# Altium PCB Obscurum-MB_1b.PcbDoc
Units mm, origin at the board's own origin, x right, y up, seen from the top; angles counter-clockwise.
Board outline 100 x 100 mm, 2 copper layers (Top Layer, Bottom Layer), stack 1.535 mm thick; 135 components, 76 nets, 310 pads, 0 vias.
Unrouted connection lines stored in the file: 220.
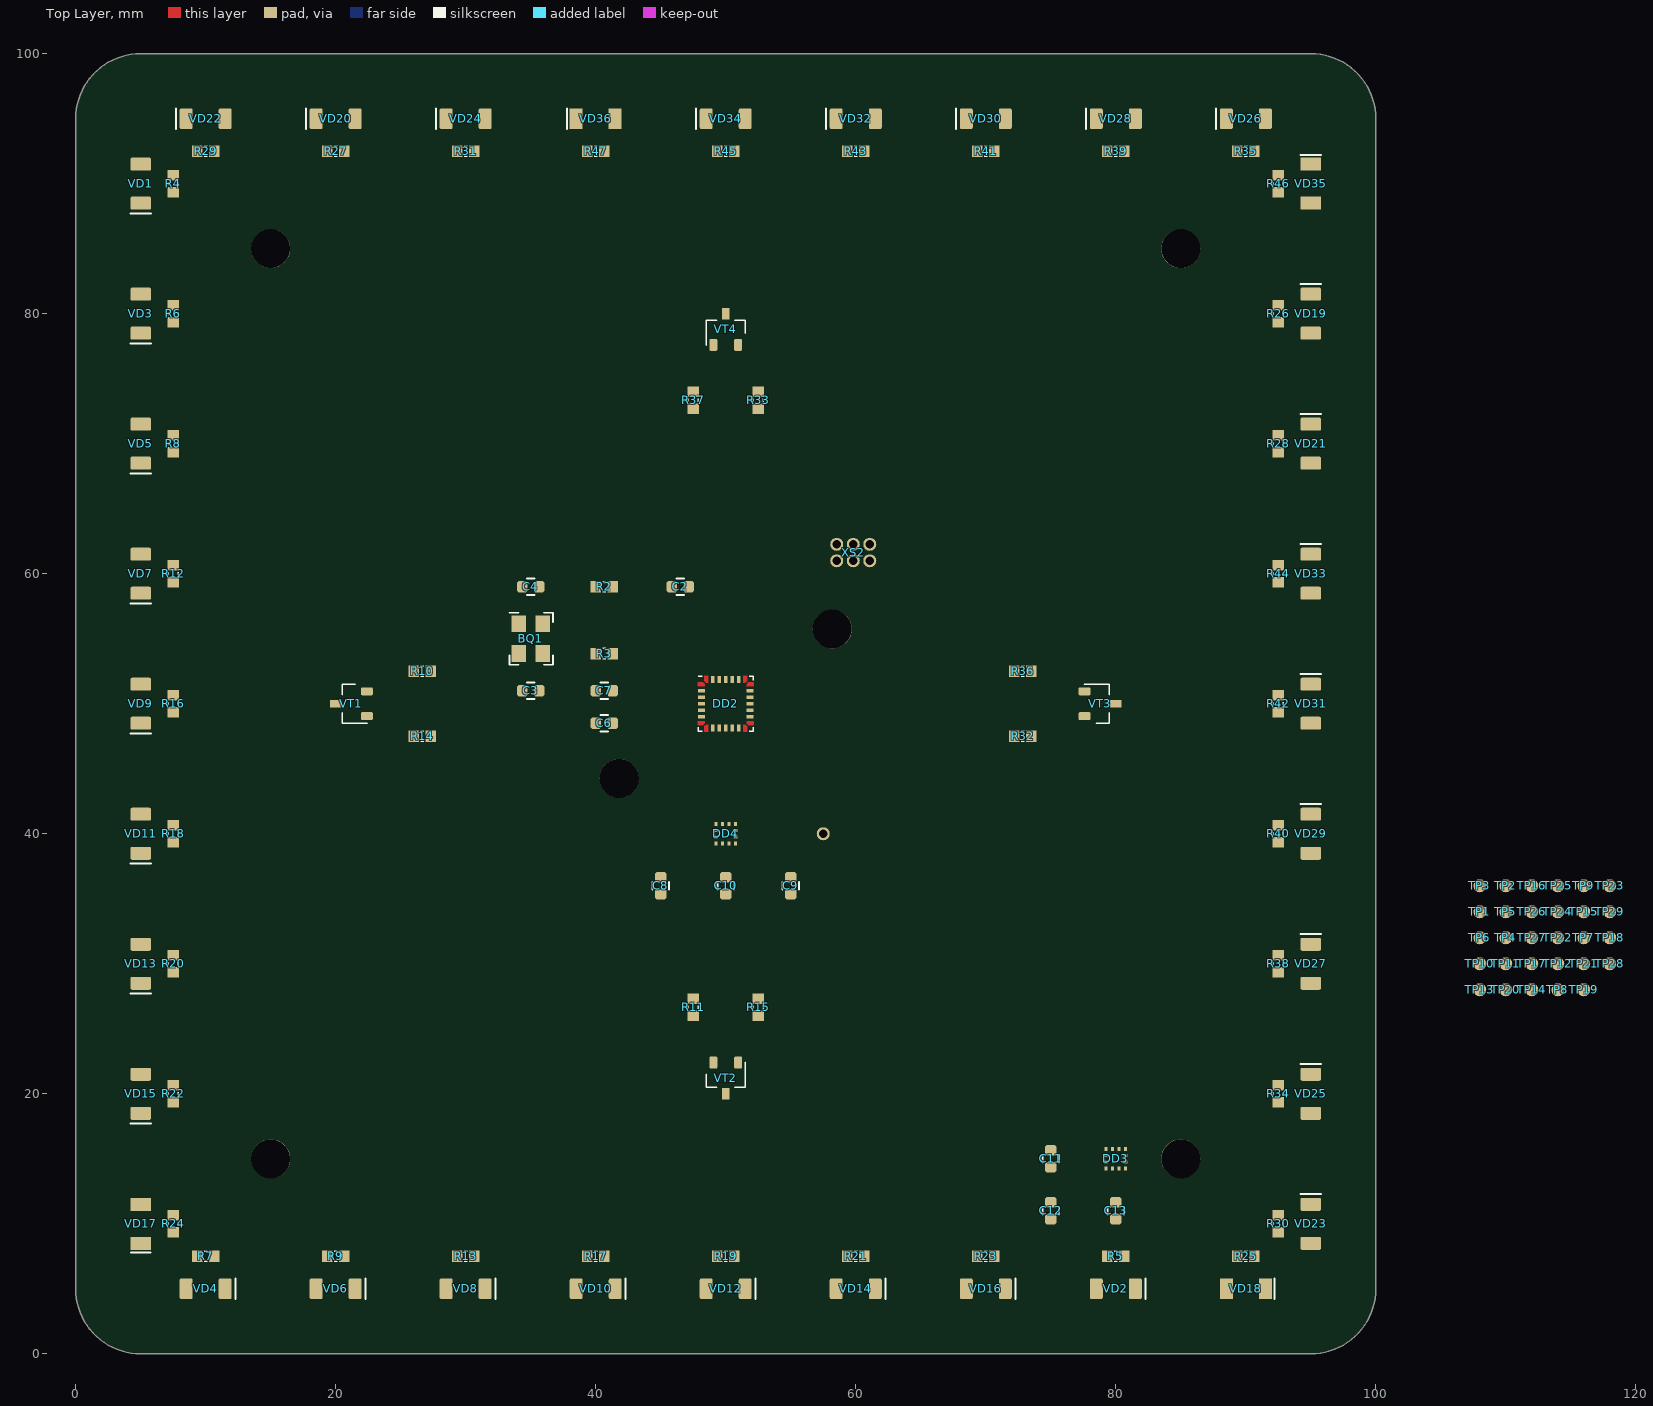
[diagram p0: Top Layer view]
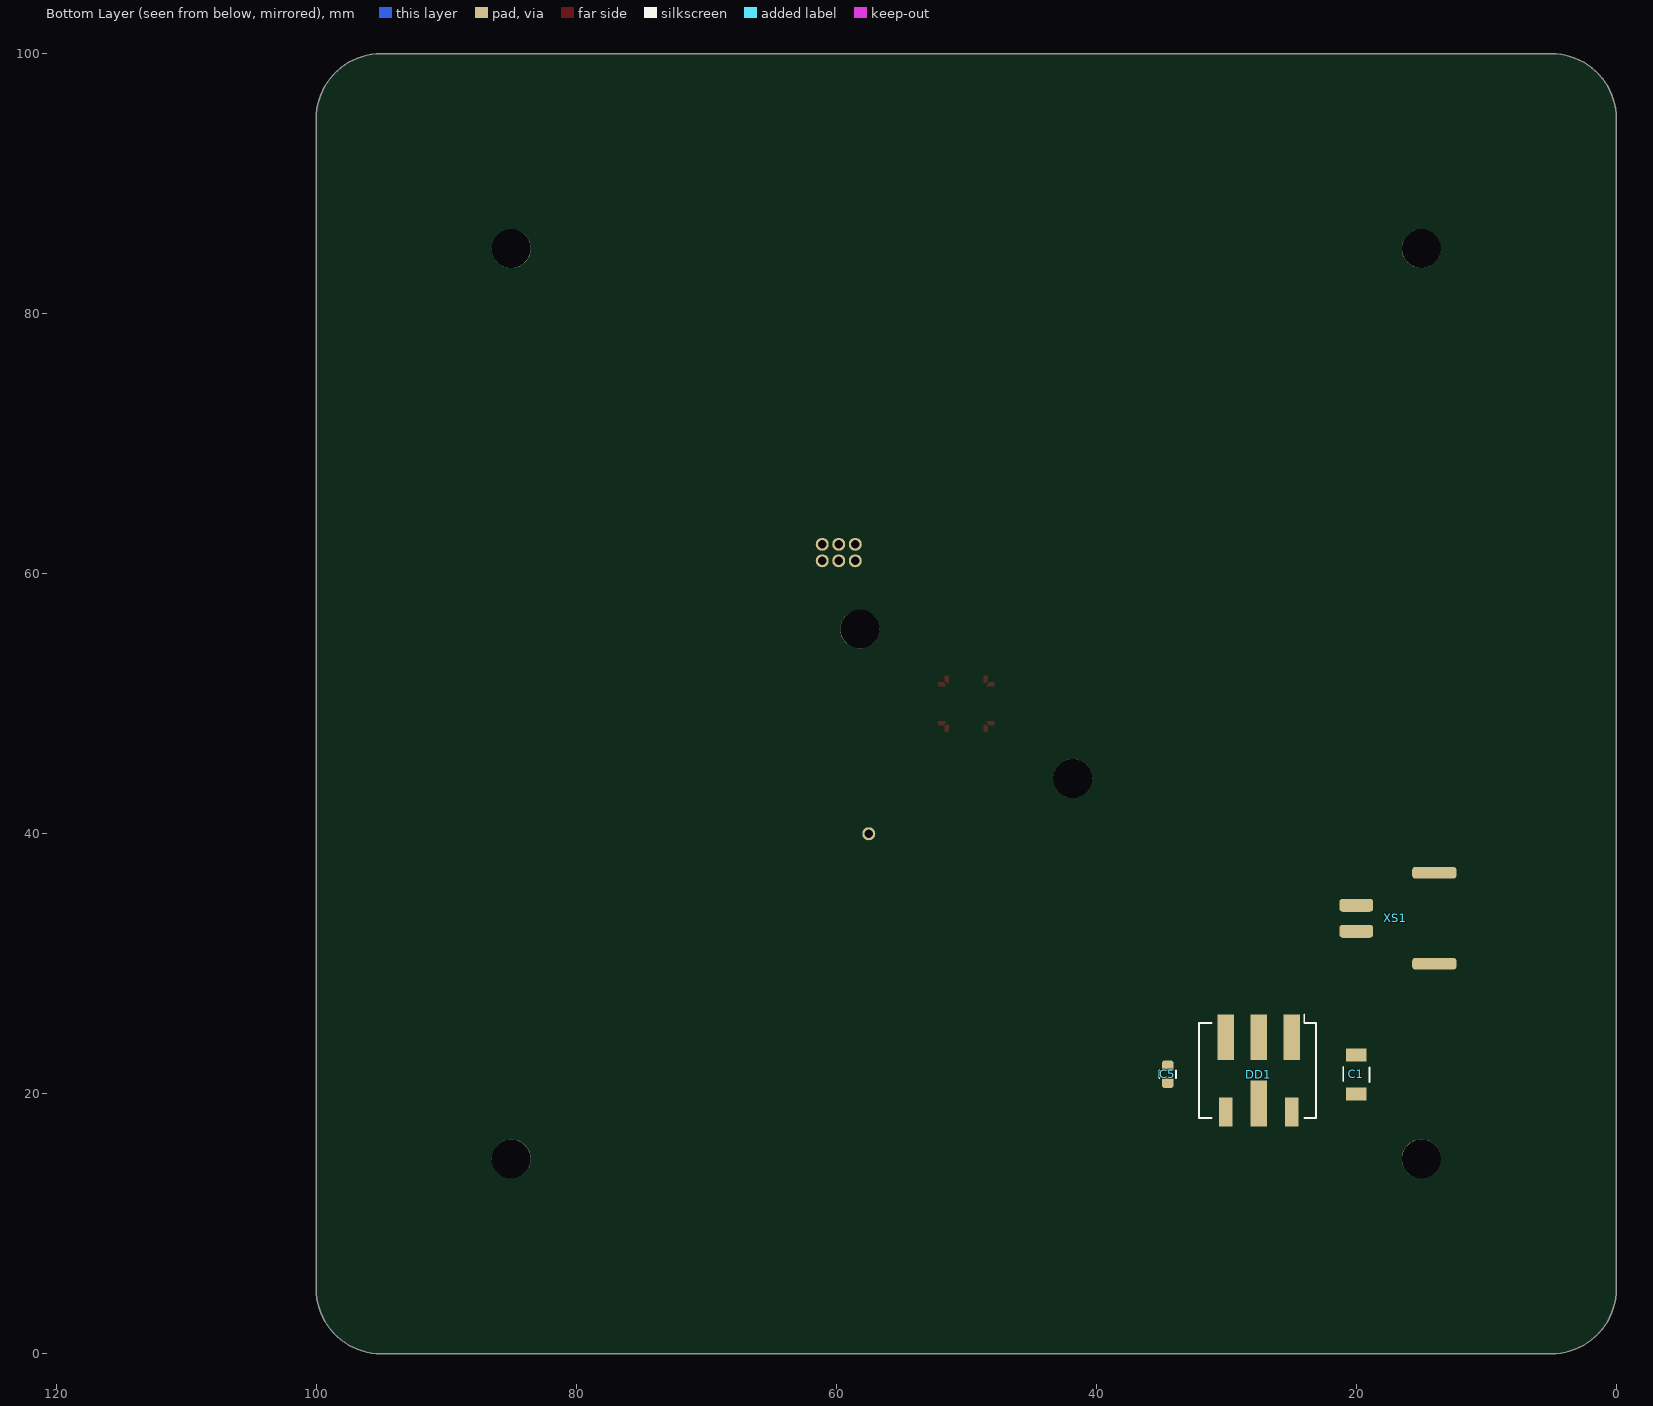
[diagram p1: Bottom Layer view, seen from below]

## Layer stack, top to bottom
Top Solder: solder mask 0.0254, SM-001, Dk 4
Top Layer: signal copper 0.018
Dielectric 1: core 1.4986, Core-043, Dk 4.3
Bottom Layer: signal copper 0.018
Bottom Solder: solder mask 0.0254, SM-001, Dk 4

## Board outline
0,5 ccw(c5,5) 5,0 95,0 ccw(c95,5) 100,5 100,95 ccw(c95,95) 95,100 5,100 ccw(c5,95) 0,95

## Design rules (kind name [scope] priority, off if disabled: settings)
AcuteAngle [All] p1: minimum=3.50000000000000E+0001 checktracksonly=FALSE
BoardOutlineClearance "BoardOutlineClearance 1" [All] p1: gap=0.25 ignorepadtopadclearanceinfootprint=FALSE except(0: Arc-SplitContinuation Track-SplitContinuation SMDPad-SplitContinuation THPad-SplitContinuation Via-SplitContinuation Fill-SplitContinuation Poly-SplitContinuation Region-SplitContinuation Text-SplitContinuation) // Milling
BoardOutlineClearance "BoardOutlineClearance 2" [All] p2: gap=0.4 ignorepadtopadclearanceinfootprint=FALSE except(0: Arc-SplitContinuation Track-SplitContinuation SMDPad-SplitContinuation THPad-SplitContinuation Via-SplitContinuation Fill-SplitContinuation Poly-SplitContinuation Region-SplitContinuation Text-SplitContinuation) // V-Cut
Clearance [(ObjectKind = 'Pad') And (AsMM(HoleDiameter) = 3)] p1: gap=0.7 ignorepadtopadclearanceinfootprint=FALSE
Clearance "Clearance-1 1 Oz" [All] p2: gap=0.2 ignorepadtopadclearanceinfootprint=TRUE except(0.25: Arc-Hole Track-Hole SMDPad-Hole THPad-Hole Via-Hole Fill-Hole Poly-Hole Region-Hole Text-Hole) // Standart
Clearance "Clearance-1 1/2 Oz" [All] p3: gap=0.125 ignorepadtopadclearanceinfootprint=FALSE except(0.2: Arc-Fill Arc-Poly Track-Fill Track-Poly SMDPad-SMDPad SMDPad-Fill SMDPad-Poly THPad-Fill THPad-Poly Via-Fill Via-Poly Fill-Fill Fill-Poly Poly-Poly Poly-Region Poly-Text; 0.25: Arc-Hole Track-Hole SMDPad-Hole THPad-Hole Via-Hole Fill-Hole Poly-Hole Region-Hole Text-Hole) // Standart
ComponentClearance [All] p1: gap=0.254 collisioncheckmode=3 verticalgap=0.254 showdistances=FALSE donotcheckwithout3dbody=TRUE
DiffPairsRouting "DiffPairsRouting 1 Oz" [All] p1: maxlimit=0.254 minlimit=0.2 mostfreqgap=0.254 toplayer_minwidth=0.2 toplayer_maxwidth=0.381 toplayer_prefwidth=0.381 bottomlayer_minwidth=0.2 bottomlayer_maxwidth=0.381 bottomlayer_prefwidth=0.381 maxuncoupledlength=12.7
DiffPairsRouting "DiffPairsRouting 1/2 Oz" [All] p2: maxlimit=0.254 minlimit=0.1 mostfreqgap=0.254 toplayer_minwidth=0.1 toplayer_maxwidth=0.381 toplayer_prefwidth=0.381 bottomlayer_minwidth=0.1 bottomlayer_maxwidth=0.381 bottomlayer_prefwidth=0.381 maxuncoupledlength=12.7
HoleSize "Minimum HoleSize" [IsPad] p1: absolutevalues=TRUE maxlimit=5.9 minlimit=0.6 maxpercent=80.000 minpercent=20.000
HoleSize "Minimum HoleSize VIA 1" [IsVia] p2: absolutevalues=TRUE maxlimit=5.9 minlimit=0.3 maxpercent=80.000 minpercent=20.000 // Standart
HoleToHoleClearance Hole2HoleClearance [All] p1: gap=0.25 allowstackedmicrovias=FALSE
MinimumAnnularRing "Minimum AR VIA Standart" [IsVia] p1: minimumring=0.15
MinimumAnnularRing "Minimum AR PAD Standart" [IsPAD] p2: minimumring=0.2
MinimumAnnularRing "Minimum AR VIA Advance" [IsVia] p3: minimumring=0.1
MinimumAnnularRing "Minimum AR PAD Advance" [IsPAD] p4: minimumring=0.15
MinimumSolderMaskSliver "SolderMask Bridge Standart" [All] p1: minsoldermaskwidth=0.15 // All Masks
MinimumSolderMaskSliver "SolderMask Bridge Advance" [All] p2: minsoldermaskwidth=0.1 // Mask LDI
PlaneClearance [(ObjectKind = 'Pad') And (AsMM(HoleDiameter) = 3)] p1: clearance=1
PlaneClearance "PlaneClearance 1 Oz" [All] p2: clearance=0.2
PlaneClearance "PlaneClearance-1 1/2 Oz" [All] p3: clearance=0.2 // Standart
PlaneConnect "TermalConnect-1 1 Oz" [All] p1: planeconnectstyle=Relief reliefexpansion=0.2 reliefentries=4 reliefconductorwidth=0.2 reliefairgap=0.2 // Standart
PolygonConnect "PolygonConnect-1 1 Oz" [All] p1: thpad.connectstyle=Relief thpad.reliefconductorwidth=0.2 thpad.reliefentries=4 thpad.polygonreliefangle="90 Angle" thpad.airgapwidth=0.2 smdpad.connectstyle=Relief smdpad.reliefconductorwidth=0.2 smdpad.reliefentries=4 smdpad.polygonreliefangle="90 Angle" smdpad.airgapwidth=0.2 via.connectstyle=Direct via.reliefconductorwidth=0.254 via.reliefentries=4 via.polygonreliefangle="90 Angle" via.airgapwidth=0.254 // Standart
PolygonConnect "PolygonConnect-1 1/2 Oz" [All] p2: thpad.connectstyle=Relief thpad.reliefconductorwidth=0.15 thpad.reliefentries=4 thpad.polygonreliefangle="90 Angle" thpad.airgapwidth=0.2 smdpad.connectstyle=Relief smdpad.reliefconductorwidth=0.2 smdpad.reliefentries=4 smdpad.polygonreliefangle="90 Angle" smdpad.airgapwidth=0.2 via.connectstyle=Direct via.reliefconductorwidth=0.254 via.reliefentries=4 via.polygonreliefangle="90 Angle" via.airgapwidth=0.254 // Standart
RoutingCorners [All] p1 off: cornerstyle=45-Degree minsetback=2.54 maxsetback=2.54
RoutingVias [All] p1: holewidth=0.3 width=0.6 viastyle="Through Hole" minholewidth=0.2 minwidth=0.4 maxholewidth=5.9 maxwidth=6.4
SilkToSilkClearance Silk2SilkClearance [All] p1 off: silktosilkclearance=0.15
SilkToSolderMaskClearance Silk2SolderMaskClearance [IsPad] p1 off: minsilkscreentomaskgap=0.15 clearancetoexposedcopper=TRUE
SolderMaskExpansion SolderMaskExpansion-1 [All] p1: expansion=0.05 istentingtop=FALSE // Standart
SolderMaskExpansion "SolderMaskExpansion LDI" [All] p2: expansion=0.025 istentingtop=FALSE // Advance
UnRoutedNet [All] p1: checkbadconnections=TRUE
Width "Width 1 Oz" [All] p1: maxlimit=10 minlimit=0.15 preferedwidth=0.2 checkconnectedcopper=TRUE
Width "Width 1/2 Oz" [All] p2: maxlimit=10 minlimit=0.1 preferedwidth=0.125 checkconnectedcopper=TRUE
19 further rules are at their usual default settings.

## Classes and differential pairs
component class Accelerometer: C8 C9 C10 C11 C12 C13 DD3 DD4 TP18 TP19 TP20 TP21 TP22 TP23 TP24 TP25 TP26 TP27 TP28 TP29
component class PWR_MCU: BQ1 C1 C2 C3 C4 C5 C6 C7 DD1 DD2 R2 R3 TP1 TP2 TP3 TP4 TP5 TP6 TP7 TP8 TP9 TP10 TP11 TP12 TP13 TP14 TP15 TP16 TP17 XS1 XS2
component class LED: R4 R5 R6 R7 R8 R9 R10 R11 R12 R13 R14 R15 R16 R17 R18 R19 R20 R21 R22 R23 R24 R25 R26 R27 R28 R29 R30 R31 R32 R33 R34 R35 R36 R37 R38 R39 R40 R41 R42 R43 R44 R45 R46 R47 VD1 VD2 VD3 VD4 VD5 VD6 VD7 VD8 VD9 VD10 VD11 VD12 VD13 VD14 VD15 VD16 VD17 VD18 VD19 VD20 VD21 VD22 VD23 VD24 VD25 VD26 VD27 VD28 VD29 VD30 VD31 VD32 VD33 VD34 VD35 VD36 VT1 VT2 VT3 VT4

## Components (designator, comment, footprint, x,y, rotation, side; value= is the part's Value field where it differs from the comment)
BQ1 "SMD3225-16.000MHz" "OSC: 3225" 35,55 r270 top
C1 "Ceramic capacitor, 10u, X7R, ±10%, 50V, 1206, -55...+125°C" "CAP: 1206" 20,21.5 r90 bottom value=10u
C2 "Ceramic capacitor, 0.1uF, X7R, ±10%, 16V, 0603, -55...+125°C" "CAP: 0603" 46.5,59 r180 top value=0.1uF
C3 "0603   20 пФ ± 10 % X7R 10В" "CAP: 0603" 35,51 r180 top value=20p
C4 "0603   20 пФ ± 10 % X7R 10В" "CAP: 0603" 35,59 r0 top value=20p
C5 "0603   1 мкФ ± 10 % X7R 16В" "CAP: 0603" 34.5,21.5 r90 bottom value=22u
C6 "Ceramic capacitor, 0.1uF, X7R, ±10%, 16V, 0603, -55...+125°C" "CAP: 0603" 40.65,48.5 r0 top value=0.1uF
C7 "Ceramic capacitor, 4.7u, X7R, ±10%, 16V, 0603, -55...+125°C" "CAP: 0603" 40.65,51 r0 top value=4.7u
C8 "Ceramic capacitor, 0.1uF, X7R, ±10%, 16V, 0603, -55...+125°C" "CAP: 0603" 45,36 r90 top value=0.1uF
C9 "Ceramic capacitor, 0.1uF, X7R, ±10%, 16V, 0603, -55...+125°C" "CAP: 0603" 55,36 r90 top value=0.1uF
C10 "Ceramic capacitor, 10uF, X7R, ±10%, 16V, 0603, -55...+125°C" "CAP: 0603" 50,36 r90 top value=10uF
C11 "Ceramic capacitor, 0.1uF, X7R, ±10%, 16V, 0603, -55...+125°C" "CAP: 0603" 75,15 r90 top value=0.1uF
C12 "Ceramic capacitor, 0.1uF, X7R, ±10%, 16V, 0603, -55...+125°C" "CAP: 0603" 75,11 r90 top value=0.1uF
C13 "Ceramic capacitor, 10uF, X7R, ±10%, 16V, 0603, -55...+125°C" "CAP: 0603" 80,11 r90 top value=10uF
DD1 "K7803MT-1000R" DFN_K7805 27.5,21.8 r0 bottom
DD2 "STM32G031G8U6" 28-UFQFPN 50,50 r0 top locked
DD3 "LIS2DH12TR" 12-LGA 80,15 r270 top
DD4 "LIS2DH12TR" 12-LGA 50,40 r270 top
R2 "Resistor film, 10k, , 0603, 0.1W, -55...+125°C" "RES: 0603" 40.65,59 r180 top value=10k
R3 "0603 62 Ом ± 5 %" "RES: 0603" 40.65,53.85 r180 top value=62
R4 "Resistor film, 50, , 0603, 0.1W, -55...+125°C" "RES: 0603" 7.5,90 r270 top value=50
R5 "Resistor film, 50, , 0603, 0.1W, -55...+125°C" "RES: 0603" 80,7.5 r0 top value=50
R6 "Resistor film, 50, , 0603, 0.1W, -55...+125°C" "RES: 0603" 7.5,80 r270 top value=50
R7 "Resistor film, 50, , 0603, 0.1W, -55...+125°C" "RES: 0603" 10,7.5 r0 top value=50
R8 "Resistor film, 50, , 0603, 0.1W, -55...+125°C" "RES: 0603" 7.5,70 r270 top value=50
R9 "Resistor film, 50, , 0603, 0.1W, -55...+125°C" "RES: 0603" 20,7.5 r0 top value=50
R10 "Resistor film, 100, , 0603, 0.1W, -55...+125°C" "RES: 0603" 26.65,52.5 r180 top value=100
R11 "Resistor film, 100, , 0603, 0.1W, -55...+125°C" "RES: 0603" 47.5,26.65 r270 top value=100
R12 "Resistor film, 50, , 0603, 0.1W, -55...+125°C" "RES: 0603" 7.5,60 r270 top value=50
R13 "Resistor film, 50, , 0603, 0.1W, -55...+125°C" "RES: 0603" 30,7.5 r0 top value=50
R14 "Resistor film, 10k, , 0603, 0.1W, -55...+125°C" "RES: 0603" 26.65,47.5 r180 top value=10k
R15 "Resistor film, 10k, , 0603, 0.1W, -55...+125°C" "RES: 0603" 52.5,26.65 r270 top value=10k
R16 "Resistor film, 50, , 0603, 0.1W, -55...+125°C" "RES: 0603" 7.5,50 r270 top value=50
R17 "Resistor film, 50, , 0603, 0.1W, -55...+125°C" "RES: 0603" 40,7.5 r0 top value=50
R18 "Resistor film, 50, , 0603, 0.1W, -55...+125°C" "RES: 0603" 7.5,40 r270 top value=50
R19 "Resistor film, 50, , 0603, 0.1W, -55...+125°C" "RES: 0603" 50,7.5 r0 top value=50
R20 "Resistor film, 50, , 0603, 0.1W, -55...+125°C" "RES: 0603" 7.5,30 r270 top value=50
R21 "Resistor film, 50, , 0603, 0.1W, -55...+125°C" "RES: 0603" 60,7.5 r0 top value=50
R22 "Resistor film, 50, , 0603, 0.1W, -55...+125°C" "RES: 0603" 7.5,20 r270 top value=50
R23 "Resistor film, 50, , 0603, 0.1W, -55...+125°C" "RES: 0603" 70,7.5 r0 top value=50
R24 "Resistor film, 50, , 0603, 0.1W, -55...+125°C" "RES: 0603" 7.5,10 r270 top value=50
R25 "Resistor film, 50, , 0603, 0.1W, -55...+125°C" "RES: 0603" 90,7.5 r180 top value=50
R26 "Resistor film, 50, , 0603, 0.1W, -55...+125°C" "RES: 0603" 92.5,80 r90 top value=50
R27 "Resistor film, 50, , 0603, 0.1W, -55...+125°C" "RES: 0603" 20,92.5 r180 top value=50
R28 "Resistor film, 50, , 0603, 0.1W, -55...+125°C" "RES: 0603" 92.5,70 r90 top value=50
R29 "Resistor film, 50, , 0603, 0.1W, -55...+125°C" "RES: 0603" 10,92.5 r180 top value=50
R30 "Resistor film, 50, , 0603, 0.1W, -55...+125°C" "RES: 0603" 92.5,10 r90 top value=50
R31 "Resistor film, 50, , 0603, 0.1W, -55...+125°C" "RES: 0603" 30,92.5 r180 top value=50
R32 "Resistor film, 100, , 0603, 0.1W, -55...+125°C" "RES: 0603" 72.85,47.5 r0 top value=100
R33 "Resistor film, 100, , 0603, 0.1W, -55...+125°C" "RES: 0603" 52.5,73.35 r90 top value=100
R34 "Resistor film, 50, , 0603, 0.1W, -55...+125°C" "RES: 0603" 92.5,20 r90 top value=50
R35 "Resistor film, 50, , 0603, 0.1W, -55...+125°C" "RES: 0603" 90,92.5 r180 top value=50
R36 "Resistor film, 10k, , 0603, 0.1W, -55...+125°C" "RES: 0603" 72.85,52.5 r0 top value=10k
R37 "Resistor film, 10k, , 0603, 0.1W, -55...+125°C" "RES: 0603" 47.5,73.35 r90 top value=10k
R38 "Resistor film, 50, , 0603, 0.1W, -55...+125°C" "RES: 0603" 92.5,30 r90 top value=50
R39 "Resistor film, 50, , 0603, 0.1W, -55...+125°C" "RES: 0603" 80,92.5 r180 top value=50
R40 "Resistor film, 50, , 0603, 0.1W, -55...+125°C" "RES: 0603" 92.5,40 r90 top value=50
R41 "Resistor film, 50, , 0603, 0.1W, -55...+125°C" "RES: 0603" 70,92.5 r180 top value=50
R42 "Resistor film, 50, , 0603, 0.1W, -55...+125°C" "RES: 0603" 92.5,50 r90 top value=50
R43 "Resistor film, 50, , 0603, 0.1W, -55...+125°C" "RES: 0603" 60,92.5 r180 top value=50
R44 "Resistor film, 50, , 0603, 0.1W, -55...+125°C" "RES: 0603" 92.5,60 r90 top value=50
R45 "Resistor film, 50, , 0603, 0.1W, -55...+125°C" "RES: 0603" 50,92.5 r180 top value=50
R46 "Resistor film, 50, , 0603, 0.1W, -55...+125°C" "RES: 0603" 92.5,90 r270 top value=50
R47 "Resistor film, 50, , 0603, 0.1W, -55...+125°C" "RES: 0603" 40,92.5 r180 top value=50
TP1 "Testpoint_HS1mm" "TestPoint(without hole)" 108,34 r0 top
TP2 "Testpoint_HS1mm" "TestPoint(without hole)" 110,36 r0 top
TP3 "Testpoint_HS1mm" "TestPoint(without hole)" 108,36 r0 top
TP4 "Testpoint_HS1mm" "TestPoint(without hole)" 110,32 r0 top
TP5 "Testpoint_HS1mm" "TestPoint(without hole)" 110,34 r0 top
TP6 "Testpoint_HS1mm" "TestPoint(without hole)" 108,32 r0 top
TP7 "Testpoint_HS1mm" "TestPoint(without hole)" 116,32 r0 top
TP8 "Testpoint_HS1mm" "TestPoint(without hole)" 114,28 r0 top
TP9 "Testpoint_HS1mm" "TestPoint(without hole)" 116,36 r0 top
TP10 "Testpoint_HS1mm" "TestPoint(without hole)" 108,30 r0 top
TP11 "Testpoint_HS1mm" "TestPoint(without hole)" 110,30 r0 top
TP12 "Testpoint_HS1mm" "TestPoint(without hole)" 114,30 r0 top
TP13 "Testpoint_HS1mm" "TestPoint(without hole)" 108,28 r0 top
TP14 "Testpoint_HS1mm" "TestPoint(without hole)" 112,28 r0 top
TP15 "Testpoint_HS1mm" "TestPoint(without hole)" 116,34 r90 top
TP16 "Testpoint_HS1mm" "TestPoint(without hole)" 112,36 r0 top
TP17 "Testpoint_HS1mm" "TestPoint(without hole)" 112,30 r0 top
TP18 "Testpoint_HS1mm" "TestPoint(without hole)" 118,32 r90 top
TP19 "Testpoint_HS1mm" "TestPoint(without hole)" 116,28 r90 top
TP20 "Testpoint_HS1mm" "TestPoint(without hole)" 110,28 r0 top
TP21 "Testpoint_HS1mm" "TestPoint(without hole)" 116,30 r90 top
TP22 "Testpoint_HS1mm" "TestPoint(without hole)" 114,32 r0 top
TP23 "Testpoint_HS1mm" "TestPoint(without hole)" 118,36 r90 top
TP24 "Testpoint_HS1mm" "TestPoint(without hole)" 114,34 r0 top
TP25 "Testpoint_HS1mm" "TestPoint(without hole)" 114,36 r0 top
TP26 "Testpoint_HS1mm" "TestPoint(without hole)" 112,34 r0 top
TP27 "Testpoint_HS1mm" "TestPoint(without hole)" 112,32 r0 top
TP28 "Testpoint_HS1mm" "TestPoint(without hole)" 118,30 r90 top
TP29 "Testpoint_HS1mm" "TestPoint(without hole)" 118,34 r90 top
VD1 "LED, Green, *, *, *, -55...+150°C" "LED: 1206Y"#1 5,90 r270 top
VD2 "LED, Green, *, *, *, -55...+150°C" "LED: 1206Y"#1 80,5 r0 top
VD3 "LED, Green, *, *, *, -55...+150°C" "LED: 1206Y"#1 5,80 r270 top
VD4 "LED, Green, *, *, *, -55...+150°C" "LED: 1206Y"#1 10,5 r0 top
VD5 "LED, Green, *, *, *, -55...+150°C" "LED: 1206Y"#1 5,70 r270 top
VD6 "LED, Green, *, *, *, -55...+150°C" "LED: 1206Y"#1 20,5 r0 top
VD7 "LED, Green, *, *, *, -55...+150°C" "LED: 1206Y"#1 5,60 r270 top
VD8 "LED, Green, *, *, *, -55...+150°C" "LED: 1206Y"#1 30,5 r0 top
VD9 "LED, Green, *, *, *, -55...+150°C" "LED: 1206Y"#1 5,50 r270 top
VD10 "LED, Green, *, *, *, -55...+150°C" "LED: 1206Y"#1 40,5 r0 top
VD11 "LED, Green, *, *, *, -55...+150°C" "LED: 1206Y"#1 5,40 r270 top
VD12 "LED, Green, *, *, *, -55...+150°C" "LED: 1206Y"#1 50,5 r0 top
VD13 "LED, Green, *, *, *, -55...+150°C" "LED: 1206Y"#1 5,30 r270 top
VD14 "LED, Green, *, *, *, -55...+150°C" "LED: 1206Y"#1 60,5 r0 top
VD15 "LED, Green, *, *, *, -55...+150°C" "LED: 1206Y"#1 5,20 r270 top
VD16 "LED, Green, *, *, *, -55...+150°C" "LED: 1206Y"#1 70,5 r0 top
VD17 "LED, Green, *, *, *, -55...+150°C" "LED: 1206Y"#2 5,10 r270 top
VD18 "LED, Green, *, *, *, -55...+150°C" "LED: 1206Y"#2 90,5 r0 top
VD19 "LED, Green, *, *, *, -55...+150°C" "LED: 1206Y"#1 95,80 r90 top
VD20 "LED, Green, *, *, *, -55...+150°C" "LED: 1206Y"#1 20,95 r180 top
VD21 "LED, Green, *, *, *, -55...+150°C" "LED: 1206Y"#1 95,70 r90 top
VD22 "LED, Green, *, *, *, -55...+150°C" "LED: 1206Y"#1 10,95 r180 top
VD23 "LED, Green, *, *, *, -55...+150°C" "LED: 1206Y"#1 95,10 r90 top
VD24 "LED, Green, *, *, *, -55...+150°C" "LED: 1206Y"#1 30,95 r180 top
VD25 "LED, Green, *, *, *, -55...+150°C" "LED: 1206Y"#1 95,20 r90 top
VD26 "LED, Green, *, *, *, -55...+150°C" "LED: 1206Y"#1 90,95 r180 top
VD27 "LED, Green, *, *, *, -55...+150°C" "LED: 1206Y"#1 95,30 r90 top
VD28 "LED, Green, *, *, *, -55...+150°C" "LED: 1206Y"#1 80,95 r180 top
VD29 "LED, Green, *, *, *, -55...+150°C" "LED: 1206Y"#1 95,40 r90 top
VD30 "LED, Green, *, *, *, -55...+150°C" "LED: 1206Y"#1 70,95 r180 top
VD31 "LED, Green, *, *, *, -55...+150°C" "LED: 1206Y"#1 95,50 r90 top
VD32 "LED, Green, *, *, *, -55...+150°C" "LED: 1206Y"#1 60,95 r180 top
VD33 "LED, Green, *, *, *, -55...+150°C" "LED: 1206Y"#1 95,60 r90 top
VD34 "LED, Green, *, *, *, -55...+150°C" "LED: 1206Y"#1 50,95 r180 top
VD35 "LED, Green, *, *, *, -55...+150°C" "LED: 1206Y"#2 95,90 r90 top
VD36 "LED, Green, *, *, *, -55...+150°C" "LED: 1206Y"#2 40,95 r180 top
VT1 "MOSFET N-channel transistor, 80V, 7A, 9.1nC, 2.5W, 34mOhm, 756pF, 8-TDSON, -55...+150°C" SOT23 21.2,50 r180 top
VT2 "MOSFET N-channel transistor, 80V, 7A, 9.1nC, 2.5W, 34mOhm, 756pF, 8-TDSON, -55...+150°C" SOT23 50,21.2 r270 top
VT3 "MOSFET N-channel transistor, 80V, 7A, 9.1nC, 2.5W, 34mOhm, 756pF, 8-TDSON, -55...+150°C" SOT23 78.8,50 r0 top
VT4 "MOSFET N-channel transistor, 80V, 7A, 9.1nC, 2.5W, 34mOhm, 756pF, 8-TDSON, -55...+150°C" SOT23 50,78.8 r90 top
XS1 "JST-PH 2.0(Female)" "JST-PH 2.0(Female)" 18.7,33.5 r270 bottom
XS2 "PBD 1.27-6R" "CON: PLLD-6R(1.27)" 58.538,60.991 r0 top

## Footprints (in the part's own frame and the unit in brackets; to place one, negate y for a bottom-side part, rotate by r counter-clockwise, add the part's x,y. Pads: shape width x height; smd on the part's side, far side on the other; paste and mask are expansions set on the pad)
12-LGA [mm]
  rect 0.275x0.25 smd: 1(-0.75,0.75) 2(-0.75,0.25) 3(-0.75,-0.25) 4(-0.75,-0.75) 7(0.75,-0.75) 8(0.75,-0.25) 9(0.75,0.25) 10(0.75,0.75)
  rect 0.25x0.275 smd: 5(-0.25,-0.75) 6(0.25,-0.75) 11(0.25,0.75) 12(-0.25,0.75)
  body extent -1,-1 1,1, height 0.95
28-UFQFPN [mm]
  round 0.025 smd: 1(-1.875,1.5) 7(-1.875,-1.5) 8(-1.5,-1.875) 14(1.5,-1.875) 15(1.875,-1.5) 21(1.875,1.5) 22(1.5,1.875) 28(-1.5,1.875)
  rrect50% 0.55x0.3 smd: 2(-1.875,1) 3(-1.875,0.5) 4(-1.875,0) 5(-1.875,-0.5) 6(-1.875,-1) 16(1.875,-1) 17(1.875,-0.5) 18(1.875,0) 19(1.875,0.5) 20(1.875,1)
  rrect50% 0.3x0.55 smd: 9(-1,-1.875) 10(-0.5,-1.875) 11(0,-1.875) 12(0.5,-1.875) 13(1,-1.875) 23(1,1.875) 24(0.5,1.875) 25(0,1.875) 26(-0.5,1.875) 27(-1,1.875)
  Top Layer region: 1.425,2.15 1.575,2.15 1.575,2.15 1.604,2.144 1.628,2.128 1.644,2.104 1.65,2.075 1.65,2.075 1.65,2.075 1.65,1.75 1.5,1.6 1.425,1.6 1.425,1.6 1.396,1.606 1.372,1.622 1.356,1.646 1.35,1.675 1.35,1.675 1.35,2.075 1.356,2.104 1.372,2.128 1.396,2.144 1.425,2.15
  Top Layer region: 2.15,1.425 2.15,1.575 2.15,1.575 2.144,1.604 2.128,1.628 2.104,1.644 2.075,1.65 2.075,1.65 2.075,1.65 1.75,1.65 1.6,1.5 1.6,1.425 1.6,1.425 1.606,1.396 1.622,1.372 1.646,1.356 1.675,1.35 1.675,1.35 2.075,1.35 2.104,1.356 2.128,1.372 2.144,1.396 2.15,1.425
  Top Layer region: 2.15,-1.425 2.15,-1.575 2.15,-1.575 2.144,-1.604 2.128,-1.628 2.104,-1.644 2.075,-1.65 2.075,-1.65 2.075,-1.65 1.75,-1.65 1.6,-1.5 1.6,-1.425 1.6,-1.425 1.606,-1.396 1.622,-1.372 1.646,-1.356 1.675,-1.35 1.675,-1.35 2.075,-1.35 2.104,-1.356 2.128,-1.372 2.144,-1.396 2.15,-1.425
  Top Layer region: 1.425,-2.15 1.575,-2.15 1.575,-2.15 1.604,-2.144 1.628,-2.128 1.644,-2.104 1.65,-2.075 1.65,-2.075 1.65,-2.075 1.65,-1.75 1.5,-1.6 1.425,-1.6 1.425,-1.6 1.396,-1.606 1.372,-1.622 1.356,-1.646 1.35,-1.675 1.35,-1.675 1.35,-2.075 1.356,-2.104 1.372,-2.128 1.396,-2.144 1.425,-2.15
  Top Layer region: -2.15,-1.425 -2.15,-1.575 -2.15,-1.575 -2.144,-1.604 -2.128,-1.628 -2.104,-1.644 -2.075,-1.65 -2.075,-1.65 -2.075,-1.65 -1.75,-1.65 -1.6,-1.5 -1.6,-1.425 -1.6,-1.425 -1.606,-1.396 -1.622,-1.372 -1.646,-1.356 -1.675,-1.35 -1.675,-1.35 -2.075,-1.35 -2.104,-1.356 -2.128,-1.372 -2.144,-1.396 -2.15,-1.425
  Top Layer region: -1.425,-2.15 -1.575,-2.15 -1.575,-2.15 -1.604,-2.144 -1.628,-2.128 -1.644,-2.104 -1.65,-2.075 -1.65,-2.075 -1.65,-2.075 -1.65,-1.75 -1.5,-1.6 -1.425,-1.6 -1.425,-1.6 -1.396,-1.606 -1.372,-1.622 -1.356,-1.646 -1.35,-1.675 -1.35,-1.675 -1.35,-2.075 -1.356,-2.104 -1.372,-2.128 -1.396,-2.144 -1.425,-2.15
  Top Layer region: -1.425,2.15 -1.575,2.15 -1.575,2.15 -1.604,2.144 -1.628,2.128 -1.644,2.104 -1.65,2.075 -1.65,2.075 -1.65,2.075 -1.65,1.75 -1.5,1.6 -1.425,1.6 -1.425,1.6 -1.396,1.606 -1.372,1.622 -1.356,1.646 -1.35,1.675 -1.35,1.675 -1.35,2.075 -1.356,2.104 -1.372,2.128 -1.396,2.144 -1.425,2.15
  Top Layer region: -2.15,1.425 -2.15,1.575 -2.15,1.575 -2.144,1.604 -2.128,1.628 -2.104,1.644 -2.075,1.65 -2.075,1.65 -2.075,1.65 -1.75,1.65 -1.6,1.5 -1.6,1.425 -1.6,1.425 -1.606,1.396 -1.622,1.372 -1.646,1.356 -1.675,1.35 -1.675,1.35 -2.075,1.35 -2.104,1.356 -2.128,1.372 -2.144,1.396 -2.15,1.425
  silkscreen extent -2.1,-2.1 2.1,2.1, body extent -2.01,-2.02 2.01,2, height 0.55
"CAP: 0603" [mm]
  rrect50% 0.8x0.9 smd: 1(-0.65,0) 2(0.65,0)
  silkscreen extent -0.3,-0.63 0.3,0.62, body extent -0.78,-0.43 0.83,0.44, height 0.8
"CAP: 1206" [mm]
  rect 1x1.6 smd: 1(-1.5,0) 2(1.5,0)
  silkscreen extent -0.6,-1 0.55,1, body extent -1.6,-0.8 1.6,0.8, height 1
"CON: PLLD-6R(1.27)" [mm]
  round 1 hole 0.65 mask+0.05: 1(0,0.005) 2(0,1.275) 3(1.27,0.005) 4(1.27,1.275) 5(2.54,0.005) 6(2.54,1.275)
DFN_K7805 [mm]
  rect 1.25x3.52 smd: 1(-2.54,-2.54) 2(0,-2.54) 3(2.54,-2.54) 5(0,2.54)
  rect 1.05x2.22 smd: 4(2.54,3.19) 6(-2.54,3.19)
  silkscreen extent -4.4,-4.3 4.6,3.65, body extent -4.43,-3.54 4.57,3.46, height 3.1
"JST-PH 2.0(Female)" [mm]
  rrect50% 0.9x3.4 smd: 0(-3.5,4.7) 0(3.5,4.7)
  rrect50% 1x2.6 smd: 1(-1,-1.3) 2(1,-1.3)
"LED: 1206Y"#1 [mm]
  rrect25% 1x1.6 smd: 1(-1.5,0) 2(1.5,0)
  silkscreen extent 2.3,-0.8 2.3,0.8, body extent -1.65,-0.81 1.55,0.79, height 1.1
"LED: 1206Y"#2 [mm]
  rect 1x1.6 smd: 1(-1.5,0) 2(1.5,0)
  silkscreen extent 2.2,-0.77 2.2,0.76, body extent -1.6,-0.8 1.6,0.8, height 1.1
"OSC: 3225" [mm]
  rect 1.3x1.1 smd: 1(-1.15,-0.925) 2(1.15,-0.925) 3(1.15,0.925) 4(-1.15,0.925)
  silkscreen extent -2,-1.65 2,1.7, body extent -1.6,-1.25 1.6,1.25, height 0.81
"RES: 0603" [mm]
  rect 0.8x0.9 smd: 1(-0.65,0) 2(0.65,0)
  silkscreen extent -0.13,-0.4 0.13,0.4, body extent -0.8,-0.4 0.8,0.4, height 0.44
SOT23 [mm]
  rrect25% 0.9x0.6 smd: 1(-1.2,0.95) 2(-1.2,-0.95) 3(1.2,0)
  silkscreen extent -1.21,-1.5 0.7,1.5, body extent -1.32,-1.52 1.32,1.52, height 1.12
"TestPoint(without hole)" [mm]
  round 1 smd: 1(0,0)

## Part data
BQ1: library part Crystal_3225, "Resonator", Frequency=16MHz, LoadCapacitance=12pF, Manufacturer="Diodes Incorporated", Package="case 3225", PartNumber=FL1000002, Temperature=-40...+85°C, Tolerance=±25ppm, ValueManufacturerPartNumber="Crystal, 16MHz, 12pF, ±25ppm, case 3225, -40...+85°C", HelpURL=https://www.digikey.com/product-detail/en/diodes-incorporated/FL1000002/FL1000002CT-ND/6042078, TypeOscilator=Crystal
C1: library part Ceramic_1206, Manufacturer=Yageo, Package=1206, PartNumber=CC1206KRX7R9BB104, Temperature=-55...+125°C, Tolerance=±10%, TypeCapacitor="Ceramic capacitor", TypeDielectric=X7R, Voltage=50V, HelpURL=https://www.digikey.com/product-detail/en/yageo/CC1206KRX7R9BB104/311-1179-1-ND/303089, ValueManufacturerPartNumber="Ceramic capacitor, 10u, X7R, ±10%, 50V, 1206, -55...+125°C"
C2 C6 C7 C8 C9 C10 C11 C12 C13: library part Ceramic_0603, Manufacturer=Yageo, Package=0603, PartNumber=CC0603KRX7R7BB104, Temperature=-55...+125°C, Tolerance=±10%, TypeCapacitor="Ceramic capacitor", TypeDielectric=X7R, Voltage=16V, HelpURL=https://www.digikey.com/product-detail/en/yageo/CC0603KRX7R7BB104/311-1088-1-ND/302998
  C2 C6 C8 C9 C11 C12: ValueManufacturerPartNumber="Ceramic capacitor, 0.1uF, X7R, ±10%, 16V, 0603, -55...+125°C"
  C7: ValueManufacturerPartNumber="Ceramic capacitor, 4.7u, X7R, ±10%, 16V, 0603, -55...+125°C"
  C10 C13: ValueManufacturerPartNumber="Ceramic capacitor, 10uF, X7R, ±10%, 16V, 0603, -55...+125°C"
C3 C4: library part Ceramic_0603, "Capacitor", Manufacturer=Yageo, Package=0603, PartNumber=CC0603KRX7R7BB104, Temperature=-55...+125°C, Tolerance=±10%, TypeCapacitor="Ceramic capacitor", TypeDielectric=X7R, ValueManufacturerPartNumber="Ceramic capacitor, 20p, X7R, ±10%, 16V, 0603, -55...+125°C", Voltage=16V, HelpURL=https://www.digikey.com/product-detail/en/yageo/CC0603KRX7R7BB104/311-1088-1-ND/302998
C5: library part Ceramic_0603, "Capacitor", Manufacturer=Yageo, Package=0603, PartNumber=CC0603KRX7R7BB104, Temperature=-55...+125°C, Tolerance=±10%, TypeCapacitor="Ceramic capacitor", TypeDielectric=X7R, ValueManufacturerPartNumber="Ceramic capacitor, 22u, X7R, ±10%, 10V, 0603, -55...+125°C", Voltage=10V, HelpURL=https://www.digikey.com/product-detail/en/yageo/CC0603KRX7R7BB104/311-1088-1-ND/302998
DD1: library part K7805MT-500R, "DC/DC converter", ComponentLink1Description=Datasheet, ComponentLink1URL=https://www.mornsun-power.com/html/pdf/K7805MT-500R4.html
DD2: "Cortex-M0+", ComponentLink1Description=Documentation, ComponentLink1URL=https://www.st.com/en/microcontrollers-microprocessors/stm32g031g8.html
DD3 DD4: "MEMS accelerometer", ComponentLink1Description=Datasheet, ComponentLink1URL=https://estore.st.com/en/lis2dh12tr-cpn.html
R2 R4 R5 R6 R7 R8 R9 R10 R11 R12 R13 R14 R15 R16 R17 R18 R19 R20 R21 R22 R23 R24 R25 R26 R27 R28 R29 R30 R31 R32 R33 R34 R35 R36 R37 R38 R39 R40 R41 R42 R43 R44 R45 R46 R47: library part Resistor_0603, Manufacturer=Yageo, Package=0603, PartNumber=RC0603JR-07100RL, Power=0.1W, Temperature=-55...+125°C, TypeResistor="Resistor film", HelpURL=https://www.digikey.com/product-detail/en/yageo/RC0603JR-07100RL/311-100GRCT-ND/729644
  R2 R14 R15 R36 R37: ValueManufacturerPartNumber="Resistor film, 10k, , 0603, 0.1W, -55...+125°C"
  R4 R5 R6 R7 R8 R9 R12 R13 R16 R17 R18 R19 R20 R21 R22 R23 R24 R25 R26 R27 R28 R29 R30 R31 R34 R35 R38 R39 R40 R41 R42 R43 R44 R45 R46 R47: ValueManufacturerPartNumber="Resistor film, 50, , 0603, 0.1W, -55...+125°C"
  R10 R11 R32 R33: ValueManufacturerPartNumber="Resistor film, 100, , 0603, 0.1W, -55...+125°C"
R3: library part Resistor_0603, "Resistor", Manufacturer=Yageo, Package=0603, PartNumber=RC0603JR-07100RL, Power=0.1W, Temperature=-55...+125°C, Tolerance=±5%, TypeResistor="Resistor film", ValueManufacturerPartNumber="Resistor film, 62, ±5%, 0603, 0.1W, -55...+125°C", HelpURL=https://www.digikey.com/product-detail/en/yageo/RC0603JR-07100RL/311-100GRCT-ND/729644
VD1 VD2 VD3 VD4 VD5 VD6 VD7 VD8 VD9 VD10 VD11 VD12 VD13 VD14 VD15 VD16 VD17 VD18 VD19 VD20 VD21 VD22 VD23 VD24 VD25 VD26 VD27 VD28 VD29 VD30 VD31 VD32 VD33 VD34 VD35 VD36: library part LED_single, Color=GREEN, ColorParameter=Green, Temperature=-55...+150°C, TypeDiode=LED, ValueManufacturerPartNumber="LED, Green, *, *, *, -55...+150°C"
VT1 VT2 VT3 VT4: library part MOSFET_N_132, CurrentDS=7A, InputCapacitor=756pF, Manufacturer="Infineon Technologies", MaxPower=2.5W, Package=8-TDSON, PartNumber=2N7002, Temperature=-55...+150°C, VoltageDS=80V, GateCharge=9.1nC, HelpURL=https://www.digikey.com/product-detail/en/infineon-technologies/BSC340N08NS3GATMA1/BSC340N08NS3GATMA1TR-ND/2080655, RDS=34mOhm, TypeTransistor="MOSFET N-channel transistor", ValueManufacturerPartNumber="MOSFET N-channel transistor, 80V, 7A, 9.1nC, 2.5W, 34mOhm, 756pF, 8-TDSON, -55...+150°C"
XS2: "DS1065-14-2X3S8BR"

## Free pads (board coordinates)
  round 3 hole 3 unplated: 0(15,15) 0(15,85) 0(41.808,44.264) 0(58.192,55.736) 0(85,15) 0(85,85)
  round 1 hole 0.65 unplated: 1(57.5,40)

## Nets (pads, with @x,y where several pads share a name; then routed paths per layer and width w, separated by ;. In a path a pad name is that pad's centre, name@x,y a point inside that pad or via, vN(x,y) a via of type N, cw(c..) or ccw(c..) an arc to the next point about the centre after c; other vN are vias at no path point)
3V3: C5.2 C6.2 C7.2 C8.2 C9.2 C10.2 C11.2 C12.2 C13.2 DD1.3 DD2.3 DD3.9 DD3.10 DD4.9 DD4.10 R2.2 R4.2 R5.2 R6.2 R7.2 R8.2 R9.2 R12.2 R13.2 R16.2 R17.2 R18.2 R19.2 R20.2 R21.2 R22.2 R23.2 R24.2 R25.2 R27.2 R29.2 R31.2 R35.2 R38.2 R39.2 R41.2 R43.2 R45.2 R47.2 TP5.1
5V_in: C1.2 DD1.1 TP6.1 XS1.2
CS_MEMS_SPI1: DD2.13 DD3.2 DD4.2 TP19.1 TP25.1
GND: C1.1 C2.1 C3.2 C4.2 C5.1 C6.1 C7.1 C8.1 C9.1 C10.1 C11.1 C12.1 C13.1 DD1.2 DD1.5 DD2.4 DD3.5 DD3.6 DD3.7 DD3.8 DD4.5 DD4.6 DD4.7 DD4.8 R14.1 R15.1 R36.1 R37.1 TP1.1 TP3.1 VT1.2 VT2.2 VT3.2 VT4.2 XS1.1 XS2.3 XS2.6
INT1: DD2.11 DD3.12 DD4.12 TP2.1 TP22.1 TP28.1
INT2: DD2.14 DD3.11 DD4.11 TP4.1 TP23.1 TP29.1
NetBQ1_3: BQ1.3 C3.1 R3.2
NetDD2_6: DD2.6 TP7.1
NetDD2_9: DD2.9 TP8.1
NetDD2_10: DD2.10 TP9.1
NetDD2_15: DD2.15 TP17.1
NetDD2_17: DD2.17 TP16.1
NetDD2_19: DD2.19 TP15.1
NetDD2_22: DD2.22 TP14.1
NetDD2_24: DD2.24 TP13.1
NetDD2_25: DD2.25 TP12.1
NetDD2_27: DD2.27 TP11.1
NetDD2_28: DD2.28 TP10.1
NetR4_1: R4.1 VD1.1
NetR5_1: R5.1 VD2.1
NetR6_1: R6.1 VD3.1
NetR7_1: R7.1 VD4.1
NetR8_1: R8.1 VD5.1
NetR9_1: R9.1 VD6.1
NetR10_2: R10.2 R14.2 VT1.1
NetR11_2: R11.2 R15.2 VT2.1
NetR12_1: R12.1 VD7.1
NetR13_1: R13.1 VD8.1
NetR16_1: R16.1 VD9.1
NetR17_1: R17.1 VD10.1
NetR18_1: R18.1 VD11.1
NetR19_1: R19.1 VD12.1
NetR20_1: R20.1 VD13.1
NetR21_1: R21.1 VD14.1
NetR22_1: R22.1 VD15.1
NetR23_1: R23.1 VD16.1
NetR24_1: R24.1 VD17.1
NetR25_1: R25.1 VD18.1
NetR26_1: R26.1 VD19.1
NetR26_2: R26.2 R28.2 R30.2 R34.2 R40.2 R42.2 R44.2 R46.2
NetR27_1: R27.1 VD20.1
NetR28_1: R28.1 VD21.1
NetR29_1: R29.1 VD22.1
NetR30_1: R30.1 VD23.1
NetR31_1: R31.1 VD24.1
NetR32_2: R32.2 R36.2 VT3.1
NetR33_2: R33.2 R37.2 VT4.1
NetR34_1: R34.1 VD25.1
NetR35_1: R35.1 VD26.1
NetR38_1: R38.1 VD27.1
NetR39_1: R39.1 VD28.1
NetR40_1: R40.1 VD29.1
NetR41_1: R41.1 VD30.1
NetR42_1: R42.1 VD31.1
NetR43_1: R43.1 VD32.1
NetR44_1: R44.1 VD33.1
NetR45_1: R45.1 VD34.1
NetR46_1: R46.1 VD35.1
NetR47_1: R47.1 VD36.1
NetVD1_2: VD1.2 VD3.2 VD5.2 VD7.2 VD9.2 VD11.2 VD13.2 VD15.2 VD17.2 VT1.3
NetVD2_2: VD2.2 VD4.2 VD6.2 VD8.2 VD10.2 VD12.2 VD14.2 VD16.2 VD18.2 VT2.3
NetVD19_2: VD19.2 VD21.2 VD23.2 VD25.2 VD27.2 VD29.2 VD31.2 VD33.2 VD35.2 VT3.3
NetVD20_2: VD20.2 VD22.2 VD24.2 VD26.2 VD30.2 VD32.2 VD34.2 VD36.2
NetVD28_2: VD28.2 VT4.3
NRST: C2.2 DD2.5 R2.1 XS2.5
OSC_IN: BQ1.1 C4.1 DD2.1
OSC_OUT: DD2.2 R3.1
SCL_MEMS_SPI1: DD2.7 DD3.1 DD4.1 TP18.1 TP24.1
SDI_MEMS_SPI1: DD2.8 DD3.4 DD4.4 TP21.1 TP27.1
SDO_MEMS_SPI1: DD2.12 DD3.3 DD4.3 TP20.1 TP26.1
SWCLK: DD2.21 XS2.2
SWDIO: DD2.20 XS2.4
TIM1_PWM_CH1: DD2.16 R10.1
TIM1_PWM_CH2: DD2.23 R11.1
TIM1_PWM_CH3: DD2.26 R32.1
TIM1_PWM_CH4: DD2.18 R33.1
pads on no net: BQ1.2 BQ1.4 DD1.4 DD1.6 XS1.0 XS2.1

## Silkscreen, mask and mechanical layers (free items; w line width, h text height)
Board:
  the board outline again, w0.1